# Altium PCB PCB_人脸识别TX510和考勤_2025-04-04.pcbdoc
Units mil, origin at the board's own origin, x right, y up, seen from the top; angles counter-clockwise.
Board outline 6555.03 x 3947.03 mil, 2 copper layers (Top Layer, Bottom Layer); 9 components, 50 nets, 93 pads, 2 vias.
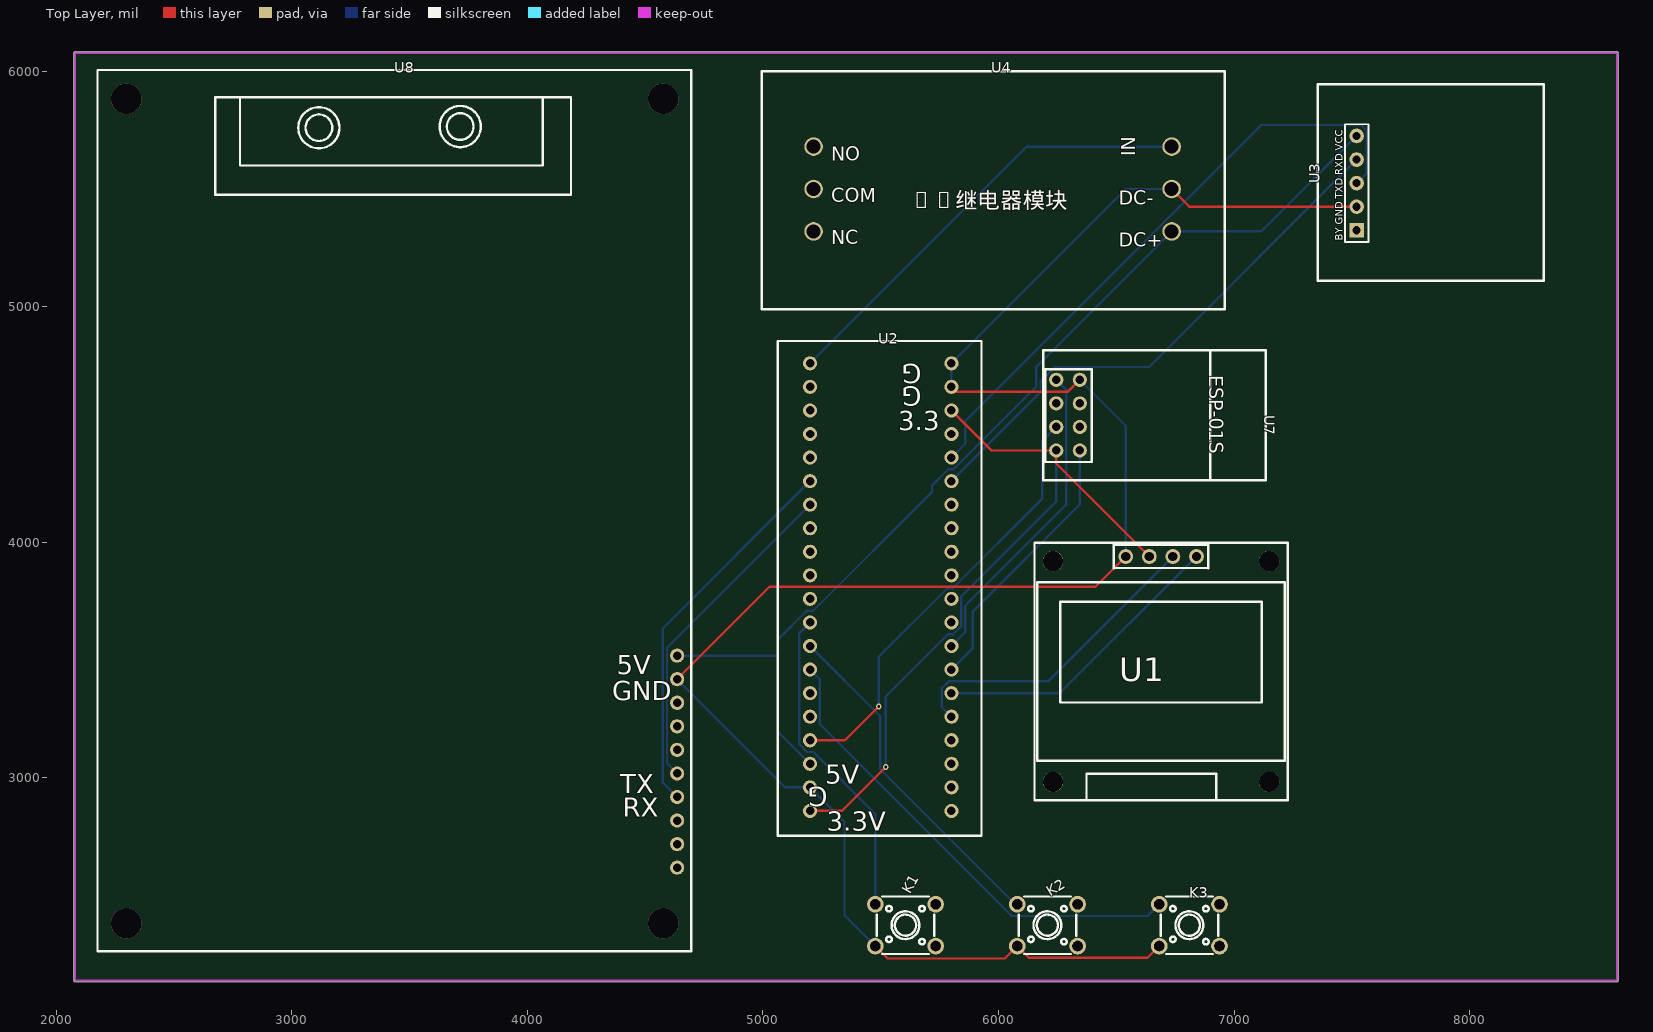
[diagram p0: Top Layer view]
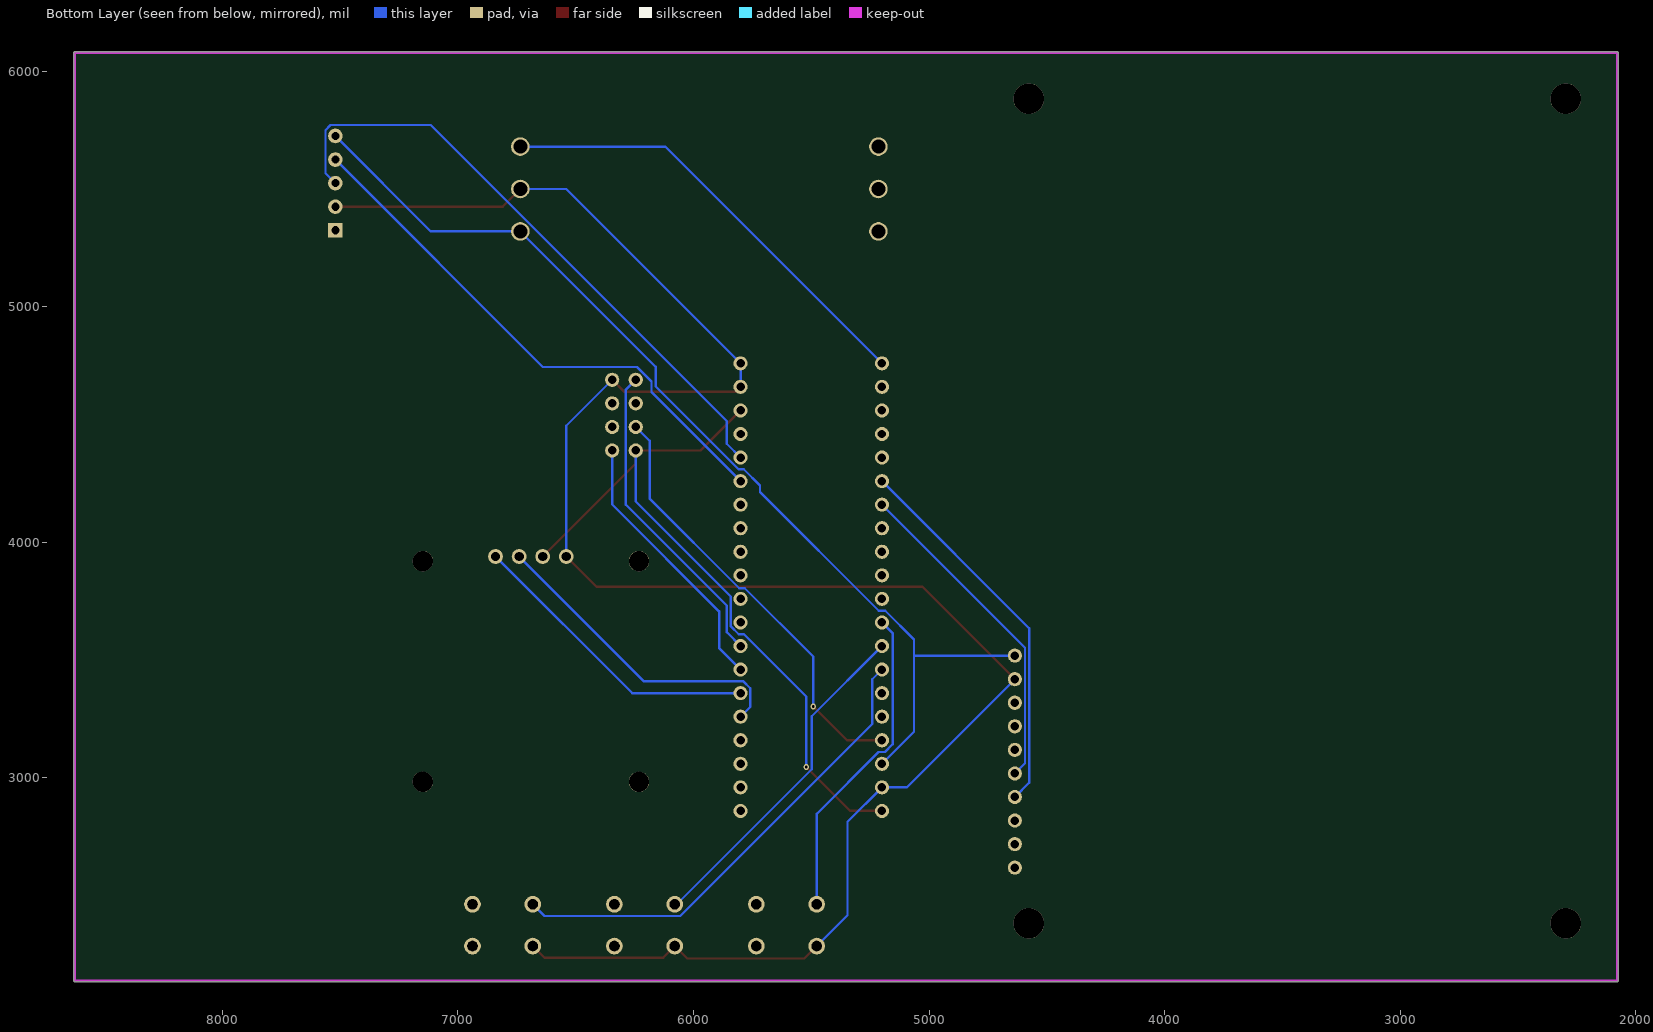
[diagram p1: Bottom Layer view, seen from below]

## Layer stack, top to bottom
Top Solder: solder mask 0.4, Solder Resist, Dk 3.5
Top Layer: signal copper 1.4
Dielectric1: dielectric 12.6, FR-4, Dk 4.8
Bottom Layer: signal copper 1.4
Bottom Solder: solder mask 0.4, Solder Resist, Dk 3.5

## Board outline
2074.99,2140 2074.98,6077 cw(c2080,6077) 2080,6082.02 8625,6082.02 cw(c8625,6077) 8630.01,6077 8630.01,2140 cw(c8625,2140) 8625,2134.99 2080,2134.99 cw(c2080,2140)

## Design rules (kind name [scope] priority, off if disabled: settings)
Clearance [All] p1: gap=10 ignorepadtopadclearanceinfootprint=FALSE except(0: Arc-Hole Track-Hole SMDPad-Hole THPad-Hole Via-Hole Fill-Hole Poly-Hole Region-Hole Text-Hole)
PolygonConnect [All] p1: connectstyle=Relief reliefconductorwidth=10 reliefentries=4 polygonreliefangle="90 Angle" airgapwidth=10
RoutingVias [All] p1: holewidth=28 width=50 viastyle="Through Hole" minholewidth=28 minwidth=50 maxholewidth=28 maxwidth=50
SolderMaskExpansion [All] p1: expansion=4 istentingtop=FALSE
Width [All] p1: maxlimit=10 minlimit=10 preferedwidth=10
30 further rules are at their usual default settings.

## Components (designator, comment, footprint, x,y, rotation, side; value= is the part's Value field where it differs from the comment)
K1 "按键" ?#1 5605,2375 r0 top
K2 "按键" ?#1 6207.5,2375 r0 top
K3 "按键" ?#1 6810,2375 r0 top
U1 "0.96 OLED IIC COPY" OLED-TH_OLED0.96-IIC 6690,3940 r0 top
U2 "STM32F103C8核心板(蓝色)" ?#2 5460,3875 r0 top
U3 "SYN6288语音合成模块" ?#3 7560,5525 r90 top
U4 "5V继电器模块" ?#4 5520,5765 r0 top
U7 "ESP8266-01s" ESP8266-01S 6690,4540 r270 top
U8 "HLK_TX510" TX510 2175,6005 r0 top

## Footprints (in the part's own frame and the unit in brackets; to place one, negate y for a bottom-side part, rotate by r counter-clockwise, add the part's x,y. Pads: shape width x height; smd on the part's side, far side on the other; paste and mask are expansions set on the pad)
ESP8266-01S [mil]
  round 60 hole 36 paste-99999 mask+2: 1(-150,-345) 2(-50,-345) 3(50,-345) 4(150,-345) 5(-150,-445) 6(-50,-445) 7(50,-445) 8(150,-445)
  silkscreen extent -275,-500 276,445
OLED-TH_OLED0.96-IIC [mm]
  round 1.6 hole 1 paste-2539.97 mask+0.05: 1(-3.81,0) 2(-1.27,0) 3(1.27,0) 4(3.81,0)
  round 2.2 hole 2.2 unplated paste-2539.97: ""(-11.65,-24.3) ""(-11.65,-0.5) ""(11.65,-24.3) ""(11.65,-0.5)
  silkscreen extent -13.65,-26.3 13.65,1.5
TX510 [mil]
  round 60 hole 36 paste-99999 mask+2: 1(2460.62,-2485.82) 2(2460.62,-2585.82) 3(2460.62,-2685.82) 4(2460.62,-2785.82) 5(2460.62,-2885.82) 6(2460.62,-2985.82) 7(2460.62,-3085.82) 8(2460.62,-3185.82) 9(2460.62,-3285.82) 10(2460.62,-3385.82)
  round 129.92 hole 129.92 unplated paste-99999: ""(122.05,-3622.04) ""(122.05,-122.05) ""(2401.57,-3622.04) ""(2401.57,-122.05)
  silkscreen extent 0,-3740 2520,0
?#1 [mm]
  round 1.8 hole 1.1 slot 1.105 at 0 deg paste-2539.97 mask+0.051: 1(-3.251,2.25) 2(3.251,2.25) 3(-3.251,-2.25) 4(3.251,-2.25)
  silkscreen extent -3.1,-3.1 3.1,3.1
?#2 [mm]
  round 1.524 hole 0.914 paste-2539.97 mask+0.102: 1(-6.604,22.479) 2(-6.604,19.939) 3(-6.604,17.399) 4(-6.604,14.859) 5(-6.604,12.319) 6(-6.604,9.779) 7(-6.604,7.239) 8(-6.604,4.699) 9(-6.604,2.159) 10(-6.604,-0.381) 11(-6.604,-2.921) 12(-6.604,-5.461) 13(-6.604,-8.001) 14(-6.604,-10.541) 15(-6.604,-13.081) 16(-6.604,-15.621) 17(-6.604,-18.161) 18(-6.604,-20.701) 19(-6.604,-23.241) 20(-6.604,-25.781) 21(8.636,-25.781) 22(8.636,-23.241) 23(8.636,-20.701) 24(8.636,-18.161) 25(8.636,-15.621) 26(8.636,-13.081) 27(8.636,-10.541) 28(8.636,-8.001) 29(8.636,-5.461) 30(8.636,-2.921) 31(8.636,-0.381) 32(8.636,2.159) 33(8.636,4.699) 34(8.636,7.239) 35(8.636,9.779) 36(8.636,12.319) 37(8.636,14.859) 38(8.636,17.399) 39(8.636,19.939) 40(8.636,22.479)
  silkscreen extent -10.1,-28.45 11.87,24.89
?#3 [mm]
  round 1.575 hole 0.889 paste-2539.97 mask+0.051: 1(5.08,1.016) 2(2.54,1.016) 3(0,1.016) 4(-2.54,1.016)
  rect 1.575x1.575 hole 0.889 paste-2539.97 mask+0.051: 5(-5.08,1.016)
  silkscreen extent -10.54,-19.18 10.67,5.21
?#4 [mm]
  round 2 hole 1.5 paste-2539.97 mask+0.051: 1(30.861,-2.159) 2(30.861,-6.731) 3(30.861,-11.303) 4(-7.747,-2.159) 5(-7.747,-6.731) 6(-7.747,-11.303)
  silkscreen extent -13.33,-19.68 36.58,5.97

## Via types
v1: diameter 24.02, hole 12.01, Top Layer to Bottom Layer, 2 vias

## Nets (pads, with @x,y where several pads share a name; then routed paths per layer and width w, separated by ;. In a path a pad name is that pad's centre, name@x,y a point inside that pad or via, vN(x,y) a via of type N, cw(c..) or ccw(c..) an arc to the next point about the centre after c; other vN are vias at no path point)
3V3: U1.2 U2.20 U2.38 U7.8 | length 3183.9
  Top Layer w10: U2.20 5334.44,2860 v1(5520.95,3046.51) ; U2.38 5970,4390 U7.8 6245,4335 U1.2
  Bottom Layer w10: v1(5520.95,3046.51) 5520.95,3345.57 5785.38,3610 5808.05,3610 5841.06,3643.01 5841.06,3769.4 6245,4173.34 U7.8
5V: U2.18 U3.1 U4.3 U8.1 | length 4418.4
  Bottom Layer w10: U8.1 5063.63,3519.18 ; U2.18 5063.63,3196.37 5063.63,3519.18 ; U3.1 7115,5320 U4.3 6160.69,4745.69 6160.69,4662.47 5808.22,4310 5786.49,4310 5717.67,4241.18 5717.67,4214.06 5213.61,3710 5186.16,3710 5063.63,3587.47 5063.63,3519.18
DR: U2.1 U4.1 | length 1916.1
  Bottom Layer w10: U2.1 6120,5680 U4.1
ESP_RST: U2.17 U7.7 | length 1863.6
  Top Layer w10: U2.17 5348.31,3160 v1(5491.36,3303.05)
  Bottom Layer w10: v1(5491.36,3303.05) 5491.36,3515.03 5781.89,3805.56 5805.52,3805.56 6186.06,4186.1 6186.06,4431.06 U7.7
ESP_RX: U2.27 U7.4 | length 1155.7
  Bottom Layer w10: U2.27 5891.11,3551.11 5891.11,3707.02 6345,4160.91 U7.4
ESP_TX: U2.28 U7.5 | length 1348.8
  Bottom Layer w10: U2.28 5858.94,3618.94 5858.94,3731.59 6286.67,4159.32 6286.67,4648.33 U7.5
GND: K1.3 K2.3 K3.3 U1.1 U2.19 U2.39 U2.40 U3.4 U4.2 U7.1 U8.2 | length 8515
  Top Layer w10: U8.2 5028.31,3811.86 6411.86,3811.86 U1.1 ; K1.3 5529.76,2233.64 6026.74,2233.64 K2.3 6128.96,2236.94 6632.54,2236.94 K3.3 ; U2.39 5820,4640 6295,4640 U7.1 ; U4.2 6810,5425 U3.4
  Bottom Layer w10: U8.2 5094.81,2960 U2.19 5346.28,2813.72 5346.28,2417.11 K1.3 ; U2.39 U2.40 6540,5500 U4.2 ; U7.1 6540,4495 U1.1
KEY1: K1.1 U2.12 | length 1364.4
  Bottom Layer w10: U2.12 5154.61,3614.61 5154.61,3142.9 5187.51,3110 5214.29,3110 5477,2847.29 K1.1
KEY2: K2.1 U2.13 | length 1465.5
  Bottom Layer w10: U2.13 5497.89,3262.11 5497.89,3036.96 6071.25,2463.6 K2.1
KEY3: K3.1 U2.14 | length 2047.3
  Bottom Layer w10: U2.14 5241.06,3418.94 5241.06,3228.92 6056.22,2413.76 6632.16,2413.76 K3.1
OLED_SCL: U1.3 U2.25 | length 1351.1
  Bottom Layer w10: U2.25 5758.56,3301.44 5758.56,3380.84 5787.72,3410 6210,3410 U1.3
OLED_SDA: U1.4 U2.26 | length 1280.2
  Bottom Layer w10: U2.26 6260,3360 U1.4
SYN_RX: U2.35 U3.2 | length 2312
  Bottom Layer w10: U2.35 6178.01,4638.01 6178.01,4683.38 6239.26,4744.63 6639.63,4744.63 U3.2
SYN_TX: U2.36 U3.3 | length 2654.4
  Bottom Layer w10: U2.36 5858.94,4418.94 5858.94,4515.25 7115.26,5771.57 7540.12,5771.57 7562.15,5749.54 7562.15,5567.15 U3.3
TX510_RX: U2.6 U8.7 | length 1624.6
  Bottom Layer w10: U8.7 4575.32,2979.49 4575.32,3635.32 U2.6
TX510_TX: U2.7 U8.6 | length 1410.2
  Bottom Layer w10: U8.6 4592.66,3062.15 4592.66,3552.66 U2.7
U2_2: U2.2
U2_3: U2.3
U2_4: U2.4
U2_5: U2.5
U2_8: U2.8
U2_9: U2.9
U2_10: U2.10
U2_11: U2.11
U2_15: U2.15
U2_16: U2.16
U2_21: U2.21
U2_22: U2.22
U2_23: U2.23
U2_24: U2.24
U2_29: U2.29
U2_30: U2.30
U2_31: U2.31
U2_32: U2.32
U2_33: U2.33
U2_34: U2.34
U2_37: U2.37
U3_5: U3.5
U4_4: U4.4
U4_5: U4.5
U4_6: U4.6
U7_2: U7.2
U7_3: U7.3
U7_6: U7.6
U8_3: U8.3
U8_4: U8.4
U8_5: U8.5
U8_8: U8.8
U8_9: U8.9
U8_10: U8.10
pads on no net: K1.2 K1.4 K2.2 K2.4 K3.2 K3.4 U1. U8.

## Text inside footprints (layer, text, board x,y; h text height)
U2: Top Overlay "3.3V" at 5270,2775 h80; Top Overlay "G" at 5275,2960 h80 r180; Top Overlay "5V" at 5265,2975 h80; Top Overlay "G" at 5675,4755 h80 r180; Top Overlay "G" at 5675,4660 h80 r180; Top Overlay "3.3" at 5575,4475 h80
U3: Top Overlay "BY GND TXD RXD VCC" at 7460.75,5280 h31.5 r90
U4: Top Overlay "IN" at 6579.53,5640 h59.05 r90; Top Overlay "DC-" at 6510,5432.97 h59.05; Top Overlay "DC+" at 6510,5255.47 h59.05; Top Overlay "NO" at 5290,5620.47 h59.05; Top Overlay "COM" at 5290,5442.97 h59.05; Top Overlay "NC" at 5290,5265.47 h59.05
U7: Top Overlay "ESP-01S" at 6895.47,4710 h59.05 r270
U8: Top Overlay "5V" at 4380,3440 h80; Top Overlay "GND" at 4360,3330 h80; Top Overlay "TX" at 4395,2935 h80; Top Overlay "RX" at 4405,2835 h80